# Altium PCB WP_STM32.PcbDoc
Units mil, origin at the board's own origin, x right, y up, seen from the top; angles counter-clockwise.
Board outline 1968.5 x 1377.95 mil, 4 copper layers (Top Layer, Layer 1, Layer 2, Bottom Layer), stack 55.118 mil thick; 52 components, 50 nets, 217 pads, 60 vias.
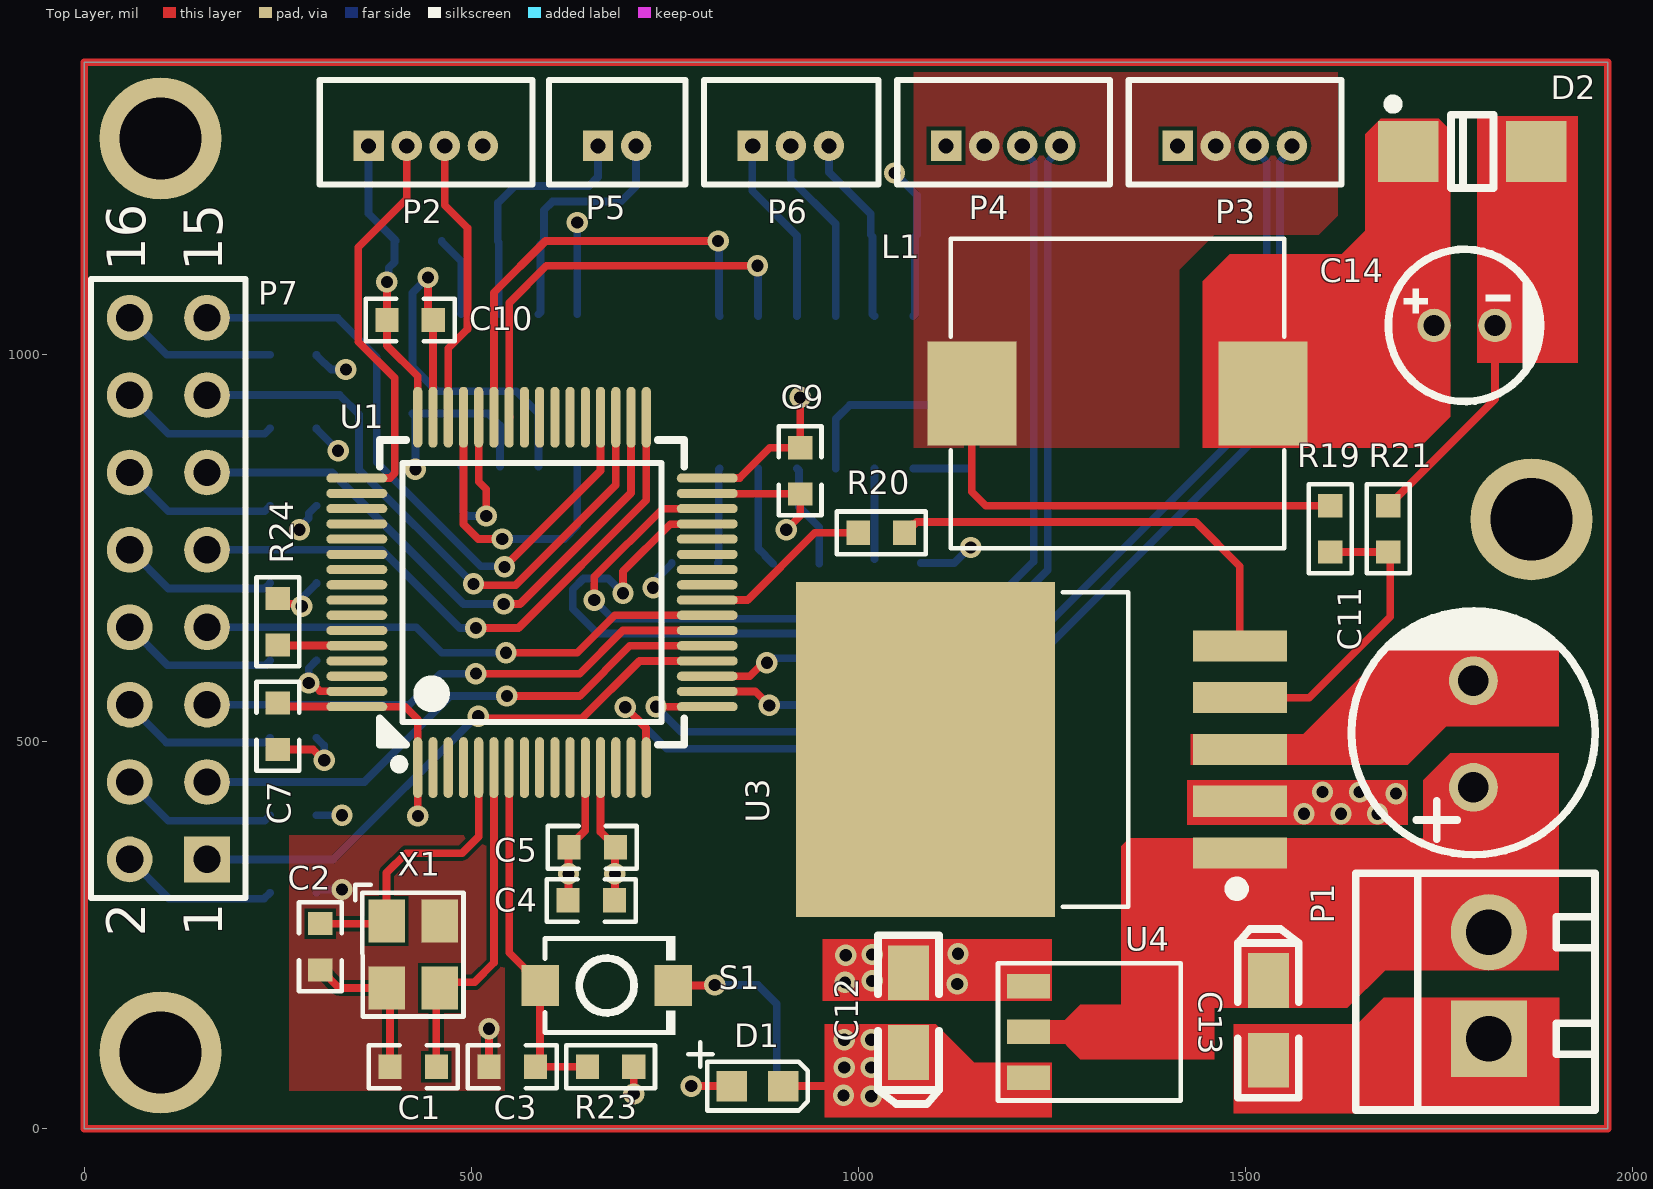
[diagram p0: Top Layer view]
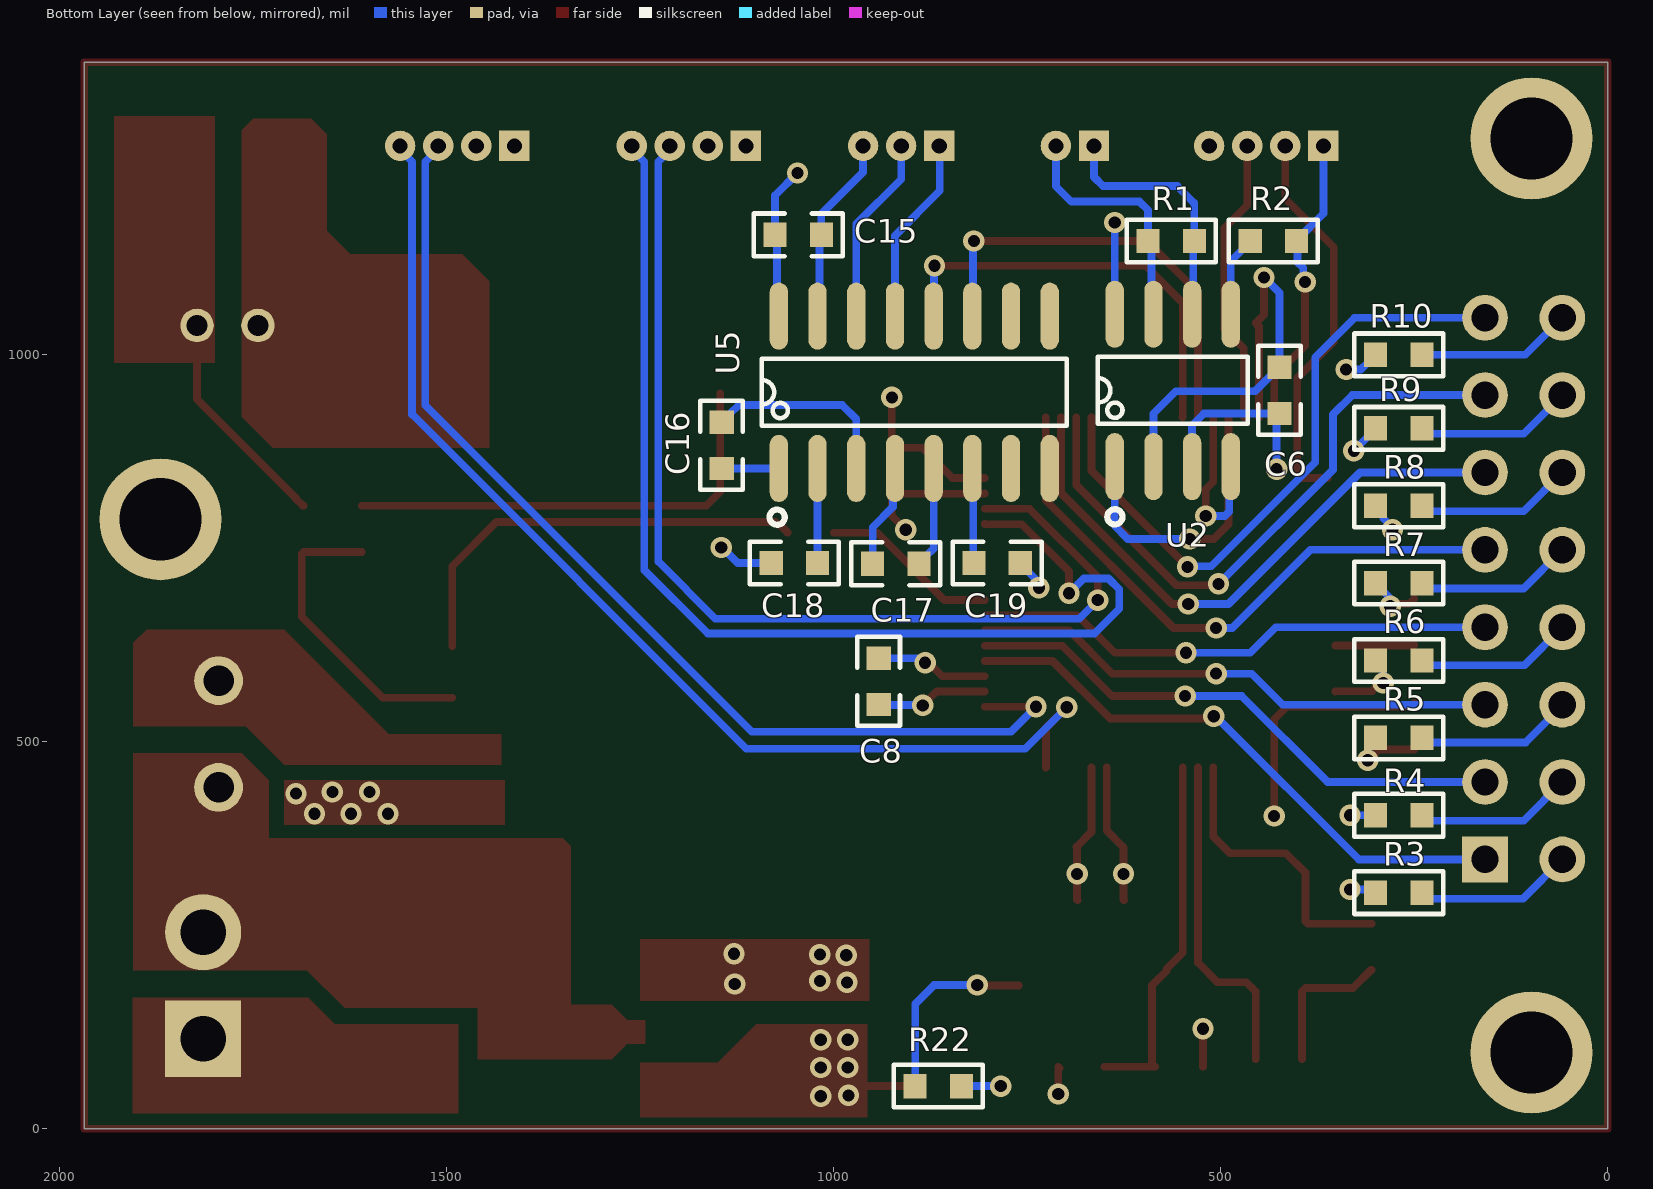
[diagram p1: Bottom Layer view, seen from below]
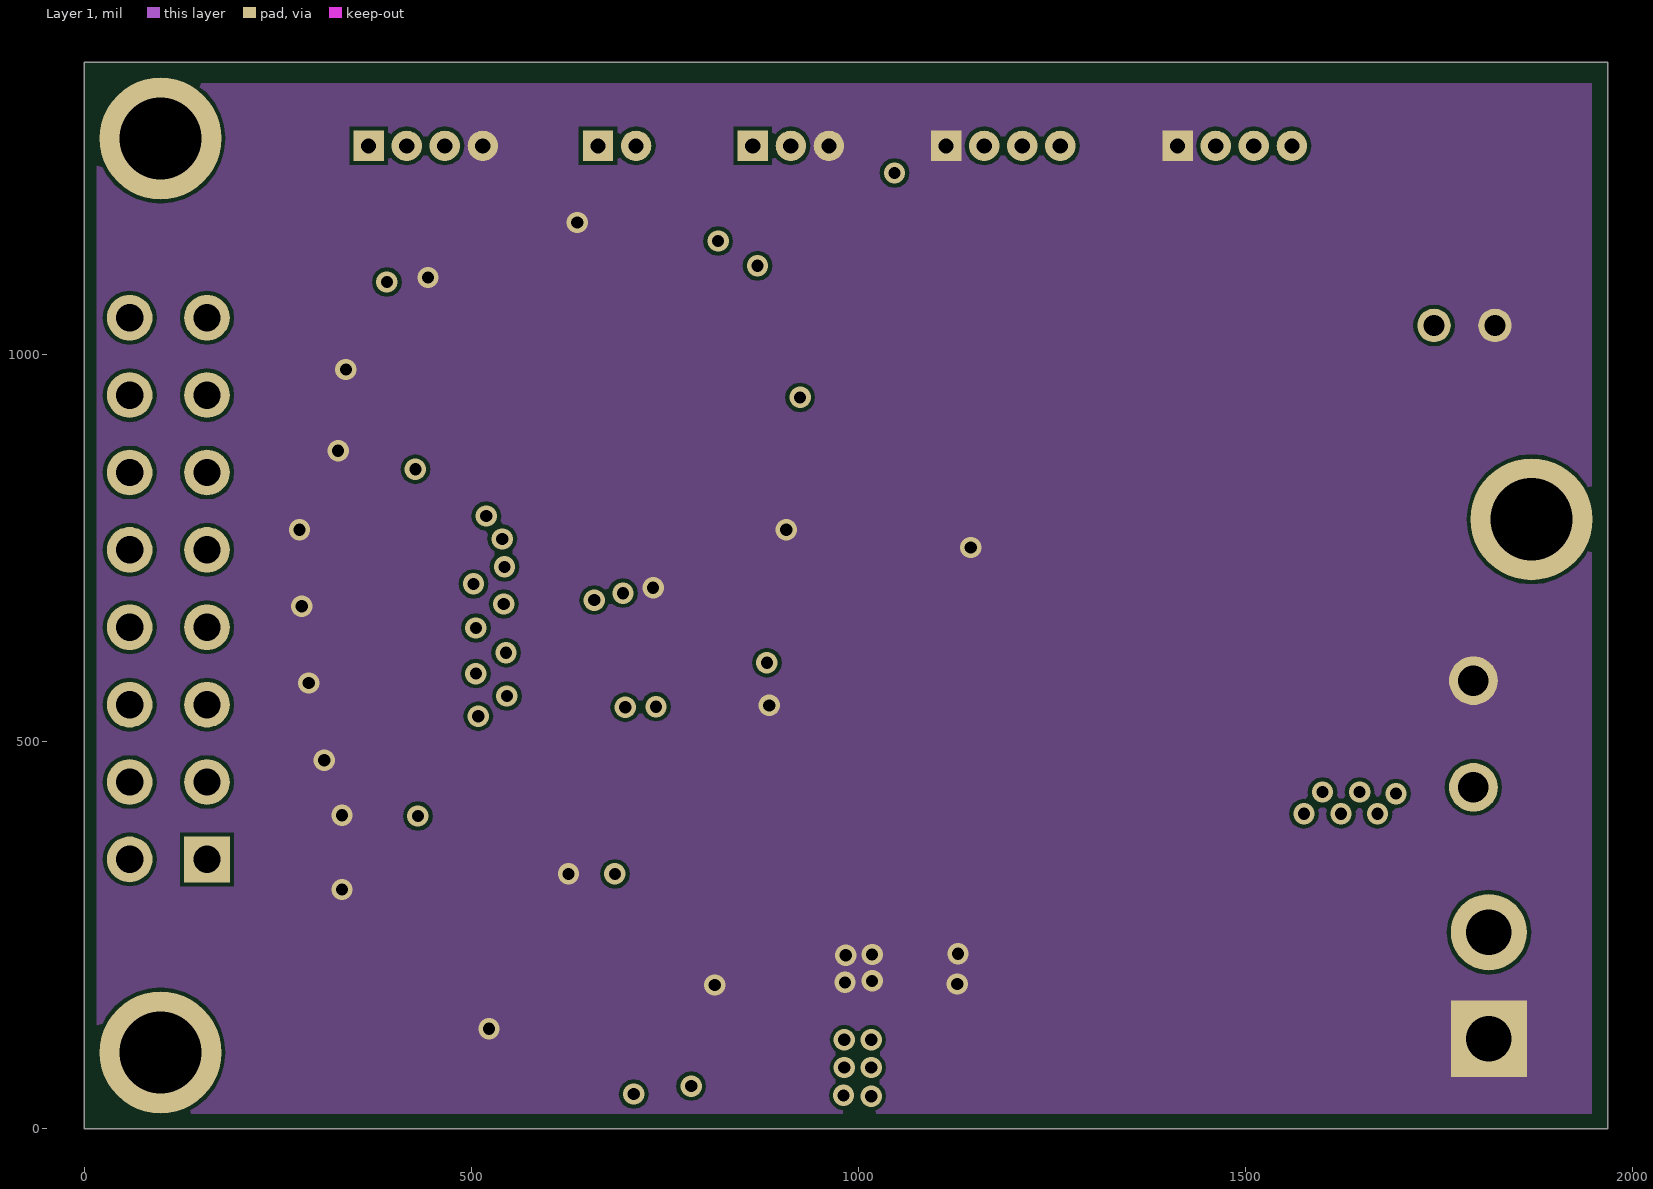
[diagram p2: Layer 1]
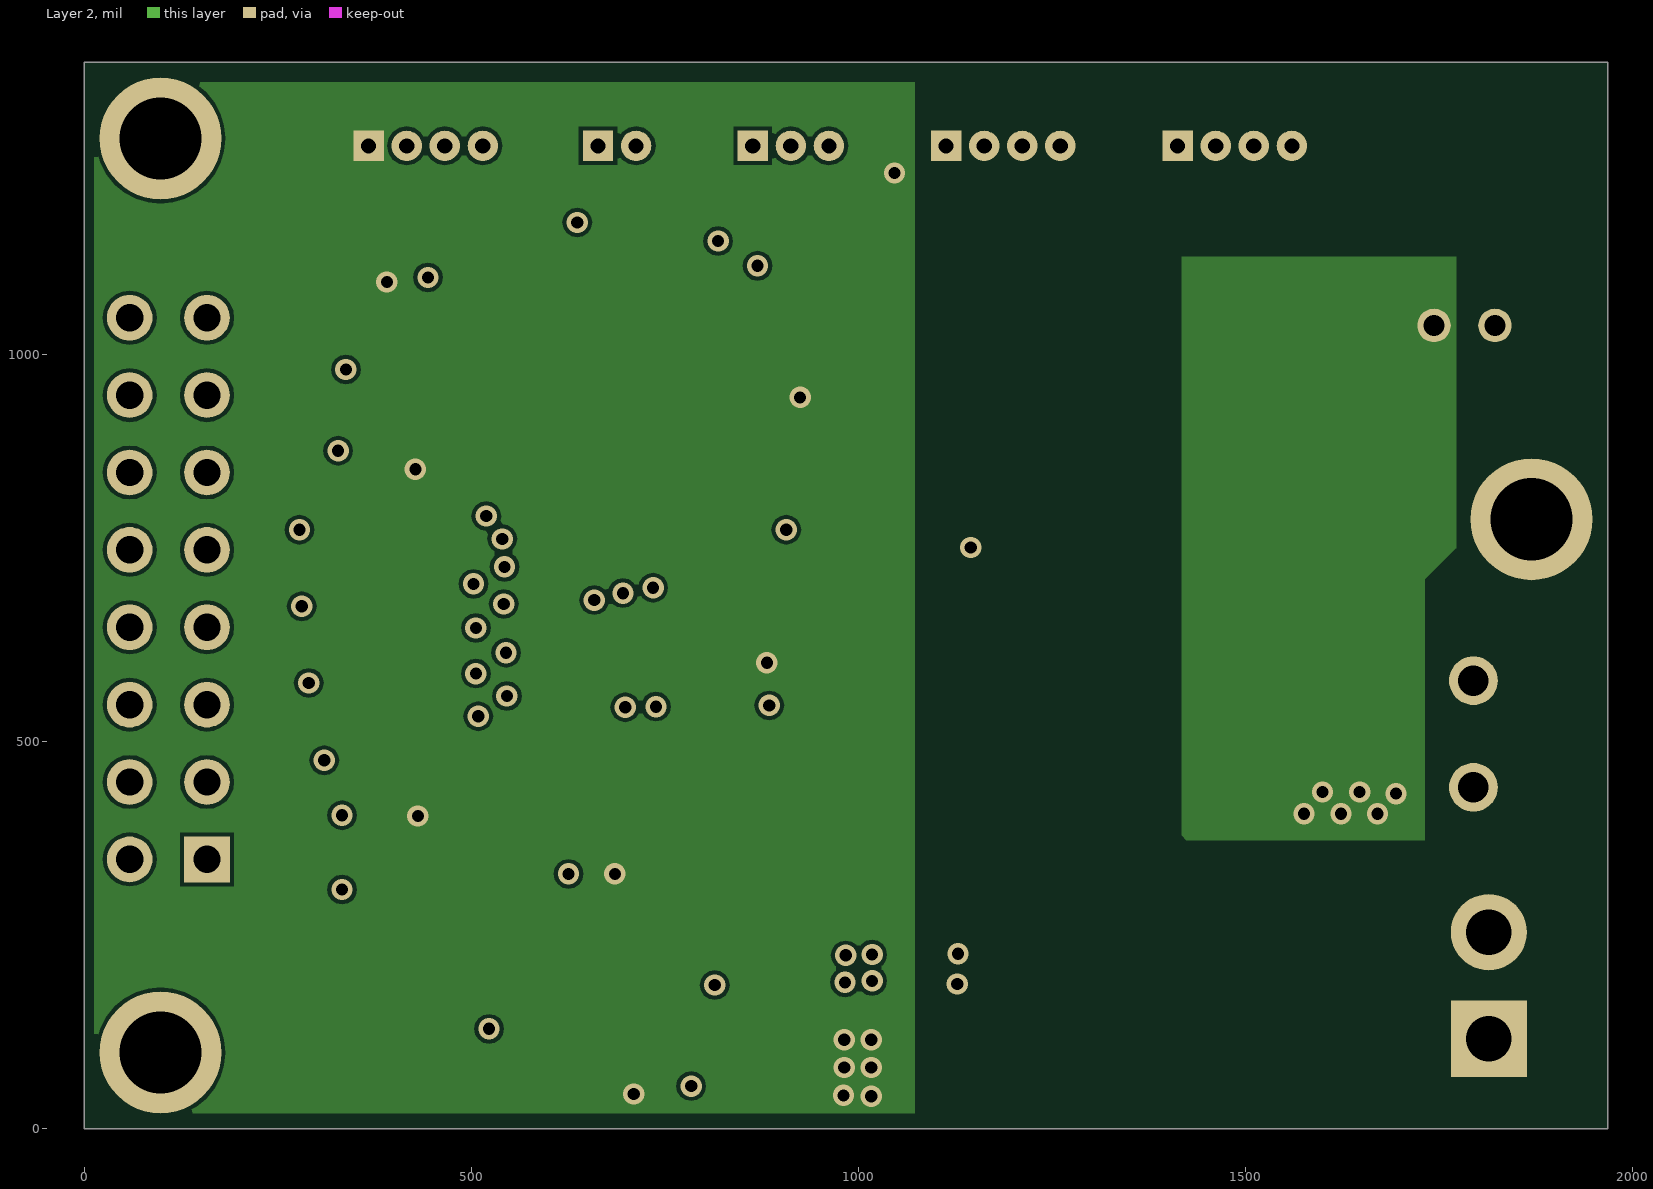
[diagram p3: Layer 2]

## Layer stack, top to bottom
Top Solder: solder mask 3.937, Solder Resist, Dk 3.5
Top Layer: signal copper 7.874
Dielectric 2: prepreg 7.874, PP-006, Dk 4.1
Layer 1: signal copper 7.874
Dielectric 1: dielectric 7.874, FR-4, Dk 4.8
Layer 2: signal copper 7.874
Dielectric 3: prepreg 7.874, PP-006, Dk 4.1
Bottom Layer: signal copper 7.874
Bottom Solder: solder mask 3.937, Solder Resist, Dk 3.5

## Board outline
0,0 0,1377.95 1968.5,1377.95 1968.5,0

## Design rules (kind name [scope] priority, off if disabled: settings)
Clearance [All] p1: gap=5 ignorepadtopadclearanceinfootprint=FALSE
PolygonConnect PolygonConnect_1 [All vs IsNamedPolygon('9V_L01_P000') Or IsNamedPolygon('GND_L01_P001') Or IsNamedPolygon('GND_L02_P002') Or IsNamedPolygon('3V3_L03_P003') Or IsNamedPolygon('NETC14_1_L03_P004')] p1: connectstyle=Direct reliefconductorwidth=10 reliefentries=4 polygonreliefangle="90 Angle" airgapwidth=10
PolygonConnect [All] p2: connectstyle=Relief reliefconductorwidth=10 reliefentries=4 polygonreliefangle="90 Angle" airgapwidth=10
RoutingVias [All] p1: holewidth=28 width=50 viastyle="Through Hole" minholewidth=28 minwidth=50 maxholewidth=28 maxwidth=50
SolderMaskExpansion [All] p1: expansion=4 istentingtop=FALSE
Width [All] p1: maxlimit=10 minlimit=10 preferedwidth=10
30 further rules are at their usual default settings.

## Components (designator, comment, footprint, x,y, rotation, side; value= is the part's Value field where it differs from the comment)
C1 "Cap" 0603C 425,80 r0 top value=22pF
C2 "Cap" 0603C 305,235 r90 top value=22pF
C3 "Cap" 0603C 553,80 r180 top value=100nF
C4 "Cap" 0603C 655,295 r180 top value=2.2uF
C5 "Cap" 0603C 656.36,363.51 r180 top value=2.2uF
C6 "Cap" 0603C 424,954 r270 bottom value=100nF
C7 "Cap" 0603C 250,520 r90 top value=100nF
C8 "Cap" 0603C 942,578 r90 bottom value=100nF
C9 "Cap" 0603C 925,850 r90 top value=100nF
C10 "Cap" 0603C 421,1045 r180 top value=100nF
C11 "220UF/35V" CAP-TH_BD8.0-P3.50-D0.6-FD 1795,510 r90 top
C12 "Cap Pol3" LC-CASE-A_3216 1065,150 r270 top value=10uF
C13 "Cap Pol3" LC-CASE-A_3216 1530,140 r90 top value=10uF
C14 "100UF/16V" CAP-TH_BD5.0-P2.00-D0.5-FD-1 1783.5,1037.95 r0 top
C15 "Cap" 0603C 1046,1155 r180 bottom value=100nF
C16 "Cap" 0603C 1145,883 r90 bottom value=100nF
C17 "Cap" 0603C 919.88,730 r180 bottom value=100nF
C18 "Cap" 0603C 1051,731 r0 bottom value=100nF
C19 "Cap" 0603C 789,731 r180 bottom value=100nF
D1 "LED_B" 0603D 870,55 r0 top
D2 "SS33" LC-SMA(DO-214AC) 1793.5,1262.95 r0 top
L1 "47UH" IND-SMD_L10.8-W10.0_SLO1040H 1335,950 r180 top
P1 "Header 2" KF350-2P 1815,185 r90 top
P2 "Header 4" "MX 1.25-LI-4P" 441.57,1270 r0 top
P3 "Header 4" "MX 1.25-LI-4P" 1487,1270 r0 top
P4 "Header 4" "MX 1.25-LI-4P" 1187.79,1270 r0 top
P5 "Header 2" "MX 1.25-LI-2P" 688.79,1270 r0 top
P6 "Header 3" "MX 1.25-LI-3P" 913,1270 r0 top
P7 "Header 8X2" HDR2X8 158.5,347.95 r90 top
R1 "Res3" 0603R 564,1147 r180 bottom value=120R
R2 "Res3" 0603R 432,1147 r180 bottom value=560R
R3 "Res3" 0603R 270,305 r180 bottom value=NC
R4 "Res3" 0603R 270,405 r180 bottom value=NC
R5 "Res3" 0603R 270,505 r180 bottom value=NC
R6 "Res3" 0603R 270,605 r180 bottom value=NC
R7 "Res3" 0603R 270,705 r180 bottom value=NC
R8 "Res3" 0603R 270,805 r180 bottom value=NC
R9 "Res3" 0603R 270,905 r180 bottom value=NC
R10 "Res3" 0603R 270,1000 r180 bottom value=NC
R19 "Res3" 0603R 1610,775 r270 top value=6491
R20 "Res3" 0603R 1030,770 r180 top value=NC
R21 "Res3" 0603R 1685,775 r90 top value=1001
R22 "Res3" 0603R 865,55 r0 bottom value=1K
R23 "Res3" 0603R 680,80 r0 top value=1K
R24 "Res3" 0603R 250,655 r90 top value=1K
S1 "TS-1101-C-W" SW-SMD_L3.9-W3.0-P4.45 675,185 r0 top
U1 "STM32F103RCT6" LQFP-64_L10.0-W10.0-P0.50-LS12.0-BL 578.5,692.95 r0 top
U2 "SN65HVD230DR" SOP8 562,954 r180 bottom
U3 "LM2596S-ADJ" TO-263-5_L10.2-W8.9-P1.70-BR 1290,490 r0 top
U4 "HT7533-1" SOT89 1220,125 r270 top
U5 "MAX3232IDR" SOP16 896,951.57 r180 bottom
X1 "X322512MSB4SI" OSC-SMD_4P-L3.2-W2.5-BL 425,225 r270 top value=12MHz

## Footprints (in the part's own frame and the unit in brackets; to place one, negate y for a bottom-side part, rotate by r counter-clockwise, add the part's x,y. Pads: shape width x height; smd on the part's side, far side on the other; paste and mask are expansions set on the pad)
0603C [mm]
  rect 0.76x0.8 smd: 1(-0.76,0) 2(0.76,0)
  silkscreen extent -1.46,-0.7 1.46,0.7, body extent -0.8,-0.41 0.8,0.41, height 0.81
0603D [mm]
  rect 1x1 smd: 1(0.85,0) 2(-0.85,0)
  silkscreen extent -2.28,-0.8 1.65,1.44, body extent -0.8,-0.4 0.8,0.42, height 0.46
0603R [mm]
  rect 0.76x0.8 smd: 1(-0.76,0) 2(0.76,0)
  silkscreen extent -1.46,-0.7 1.46,0.7, body extent -0.8,-0.4 0.8,0.4, height 0.45
CAP-TH_BD5.0-P2.00-D0.5-FD-1 [mm]
  round 1.1 hole 0.7 paste-2539.97 mask+0.05: 1(-1,0) 2(1,0)
  silkscreen extent -2.5,-2.5 2.54,2.5, body extent -2.49,-2.49 2.51,2.49, height 11.01
CAP-TH_BD8.0-P3.50-D0.6-FD [mm]
  round 1.6 hole 1: 1(-1.75,0) 2(1.75,0)
  silkscreen extent -3.96,-4 4.04,4, body extent -4,-4 4.01,4, height 11.51
HDR2X8 [mm] "Connector; Header; 8x2 Position"
  rect 1.5x1.5 hole 0.9: 1(0,0)
  round 1.5 hole 0.9: 2(0,2.54) 3(2.54,0) 4(2.54,2.54) 5(5.08,0) 6(5.08,2.54) 7(7.62,0) 8(7.62,2.54) 9(10.16,0) 10(10.16,2.54) 11(12.7,0) 12(12.7,2.54) 13(15.24,0) 14(15.24,2.54) 15(17.78,0) 16(17.78,2.54)
  silkscreen extent -1.27,-1.27 19.05,3.81
IND-SMD_L10.8-W10.0_SLO1040H [mm]
  rect 2.924x3.42 smd: 1(4.778,0) 2(-4.778,0)
  silkscreen extent -5.48,-5.08 5.48,5.08, body extent -4.95,-4.5 4.95,4.5, height 4.7
KF350-2P [mm] "可拼接端子/10A"
  rect 2.5x2.5 hole 1.5: 1(-1.75,0)
  round 2.5 hole 1.5: 2(1.75,0)
  silkscreen extent -4.09,-3.48 3.69,4.37, body extent -3.9,-3.3 3.5,4.2, height 10
LC-CASE-A_3216 [mm]
  rect 1.8x1.35 smd: 1(1.31,0) 2(-1.31,0)
  silkscreen extent -2.54,-1 3,1, body extent -1.7,-0.84 1.7,0.84, height 1.71
LC-SMA(DO-214AC) [mm]
  rect 2x2 smd: 1(2.1,0) 2(-2.1,0)
  silkscreen extent -2.72,-1.2 0.7,1.67, body extent -2.3,-1.35 2.3,1.35, height 2.4
LQFP-64_L10.0-W10.0-P0.50-LS12.0-BL [mm]
  oval 0.3x2 smd: 1(-3.75,-5.75) 2(-3.25,-5.75) 3(-2.75,-5.75) 4(-2.25,-5.75) 5(-1.75,-5.75) 6(-1.25,-5.75) 7(-0.75,-5.75) 8(-0.25,-5.75) 9(0.25,-5.75) 10(0.75,-5.75) 11(1.25,-5.75) 12(1.75,-5.75) 13(2.25,-5.75) 14(2.75,-5.75) 15(3.25,-5.75) 16(3.75,-5.75) 33(3.75,5.75) 34(3.25,5.75) 35(2.75,5.75) 36(2.25,5.75) 37(1.75,5.75) 38(1.25,5.75) 39(0.75,5.75) 40(0.25,5.75) 41(-0.25,5.75) 42(-0.75,5.75) 43(-1.25,5.75) 44(-1.75,5.75) 45(-2.25,5.75) 46(-2.75,5.75) 47(-3.25,5.75) 48(-3.75,5.75)
  oval 2x0.3 smd: 17(5.75,-3.75) 18(5.75,-3.25) 19(5.75,-2.75) 20(5.75,-2.25) 21(5.75,-1.75) 22(5.75,-1.25) 23(5.75,-0.75) 24(5.75,-0.25) 25(5.75,0.25) 26(5.75,0.75) 27(5.75,1.25) 28(5.75,1.75) 29(5.75,2.25) 30(5.75,2.75) 31(5.75,3.25) 32(5.75,3.75) 49(-5.75,3.75) 50(-5.75,3.25) 51(-5.75,2.75) 52(-5.75,2.25) 53(-5.75,1.75) 54(-5.75,1.25) 55(-5.75,0.75) 56(-5.75,0.25) 57(-5.75,-0.25) 58(-5.75,-0.75) 59(-5.75,-1.25) 60(-5.75,-1.75) 61(-5.75,-2.25) 62(-5.75,-2.75) 63(-5.75,-3.25) 64(-5.75,-3.75)
  silkscreen extent -5,-5.79 5,5, body extent -6,-6 6,6, height 1.45
"MX 1.25-LI-2P" [mm] "长：4.25mm，宽：3.2mm，高：4.2mm"
  rect 1x1 hole 0.5: 1(-0.635,0)
  round 1 hole 0.5: 2(0.615,0)
  silkscreen extent -2.24,-1.27 2.24,2.16, body extent -2.12,-1.15 2.12,2.05, height 4.25
"MX 1.25-LI-3P" [mm] "长：5.5mm，宽：3.2mm，高：4.2mm"
  rect 1x1 hole 0.5: 1(-1.25,0)
  round 1 hole 0.5: 2(0,0) 3(1.25,0)
  silkscreen extent -2.85,-1.27 2.87,2.16, body extent -2.74,-1.15 2.76,2.05, height 4.25
"MX 1.25-LI-4P" [mm] "长：6.75mm，宽：3.2mm，高：4.2mm"
  rect 1x1 hole 0.5: 1(-1.885,0)
  round 1 hole 0.5: 2(-0.635,0) 3(0.615,0) 4(1.865,0)
  silkscreen extent -3.49,-1.27 3.49,2.16, body extent -3.37,-1.15 3.37,2.05, height 4.25
OSC-SMD_4P-L3.2-W2.5-BL [mm]
  rect 1.4x1.2 smd: 1(-1.1,-0.875) 2(1.1,-0.875) 3(1.1,0.875) 4(-1.1,0.875)
  silkscreen extent -2.29,-1.9 2.03,1.65, body extent -1.6,-1.2 1.6,1.3, height 0.7
SOP8 [mm]
  oval 0.6x2.2 smd: 1(-1.905,-2.5) 2(-0.635,-2.5) 3(0.635,-2.5) 4(1.905,-2.5) 5(1.905,2.5) 6(0.635,2.5) 7(-0.635,2.5) 8(-1.905,2.5)
  silkscreen extent -2.46,-4.4 2.46,1.1, body extent -2.5,-3 2.5,3, height 1.9
SOP16 [mm]
  oval 0.6x2.2 smd: 1(-4.445,-2.5) 2(-3.175,-2.5) 3(-1.905,-2.5) 4(-0.635,-2.5) 5(0.635,-2.5) 6(1.905,-2.5) 7(3.175,-2.5) 8(4.445,-2.5) 9(4.445,2.5) 10(3.175,2.5) 11(1.905,2.5) 12(0.635,2.5) 13(-0.635,2.5) 14(-1.905,2.5) 15(-3.175,2.5) 16(-4.445,2.5)
  silkscreen extent -5,-4.35 5,1.1, body extent -5,-3 5,3, height 1.9
SOT89 [mm]
  rect 0.8x1.4 smd: 1(-1.5,0) 2(0,0) 3(1.5,0)
  Top Layer region: 0.402,3.702 0.9,4.2 0.4,4.7 -0.098,4.202
  Top Layer region: -0.398,3.698 0.102,4.198 -0.4,4.7 -0.9,4.2
  Top Layer region: -0.4,4.1 0.4,4.1 0.4,4.7 -0.4,4.7
  Top Layer region: -0.9,1.7 0.9,1.7 0.9,4.2 -0.9,4.2
  Top Layer region: 0,0.8 0.9,1.7 0,2.6 -0.9,1.7
  Top Layer region: -0.4,0.6 0.4,0.6 0.4,1.2 -0.4,1.2
  silkscreen extent -2.25,-1 2.25,5, body extent -2.25,-0.06 2.25,4.24, height 1.51
SW-SMD_L3.9-W3.0-P4.45 [mm]
  rect 1.23x1.36 smd: 1(-2.185,0) 2(2.185,0)
  silkscreen extent -2.03,-1.62 2.25,1.62
TO-263-5_L10.2-W8.9-P1.70-BR [mm]
  rect 3.083x1.02 smd: 1(5.16,-3.4) 2(5.16,-1.7) 3(5.16,0) 4(5.16,1.7) 5(5.16,3.4)
  rect 8.5x11 smd: 6(-5.16,0)
  silkscreen extent -0.66,-5.16 5.26,5.16, body extent -8.28,-5 5.05,5, height 4.5

## Part data
C1 C2 C3 C4 C5 C6 C7 C8 C9 C10 C15 C16 C17 C18 C19: "Capacitor", LatestRevisionDate=17-Jul-2002, LatestRevisionNote="Re-released for DXP Platform.", PackageDescription="Radial Cap, Thru-Hole; 2 Leads; 0.3 in Pin Spacing", PackageReference=RAD-0.3, Published=8-Jun-2000, Publisher="Altium Limited"
C11 C14: library part C+
C12 C13: "Polarized Capacitor (Surface Mount)", LatestRevisionDate=29-May-2009, LatestRevisionNote="IPC-7351 Footprint Added.", PackageDescription="Chip Capacitor", PackageReference=C0805, Published=8-Jun-2000, Publisher="Altium Limited"
D1: library part LED2, "Typical RED, GREEN, YELLOW, AMBER GaAs LED", LatestRevisionDate=17-Jul-2002, LatestRevisionNote="Re-released for DXP Platform.", PackageDescription="SM LED; 2 Flat Leads", PackageReference=3.2X1.6X1.1, PackageVersion=Feb-2002, Published=8-Jun-2000, Publisher="Altium Limited"
D2: library part D
L1: library part L
P1 P5: "Header, 2-Pin", LatestRevisionDate=17-Jul-2002, LatestRevisionNote="Re-released for DXP Platform.", Publisher="Altium Limited"
P2 P3 P4: "Header, 4-Pin", LatestRevisionDate=17-Jul-2002, LatestRevisionNote="Re-released for DXP Platform.", Publisher="Altium Limited"
P6: "Header, 3-Pin", LatestRevisionDate=17-Jul-2002, LatestRevisionNote="Re-released for DXP Platform.", Publisher="Altium Limited"
P7: "Header, 8-Pin, Dual row", LatestRevisionDate=17-Jul-2002, LatestRevisionNote="Re-released for DXP Platform.", Publisher="Altium Limited"
R1 R2 R3 R4 R5 R6 R7 R8 R9 R10 R19 R20 R21 R22 R23 R24: "Resistor", LatestRevisionDate=29-May-2009, LatestRevisionNote="IPC-7351 Footprint Added.", PackageDescription="Chip Resistor", PackageReference=J1-0603, Published=8-Jun-2000, Publisher="Altium Limited"
S1: library part SW-PB, "Switch", LatestRevisionDate=17-Jul-2002, LatestRevisionNote="Re-released for DXP Platform.", PackageDescription="Switch; 2 Leads", PackageReference=SPST-2, Published=24-Mar-1999, Publisher="Altium Limited"
U1: JLCPCB Part Class="Extended Part", Low-Voltage Detect=有, Manufacturer=ST(意法半导体), Operating Temperature Range=-40℃~+85℃, Operating Voltage Range=2V~3.6V, ADC (Bit)=12bit, Add into BOM=yes, CCP Capture/Compare=-, communication protocol=-, Convert to PCB=yes, CPU Core=CM3, CPU Maximum Speed=72MHz, DAC (Bit)=12bit, Datasheet=https://atta.szlcsc.com/upload/public/pdf/source/20180207/C88442_15179953708671359491.pdf, Device=STM32F103RCT6, Direct Memory Access=有, GPIO Ports Number=51, Infrared Data Association=有, Internal Comparator=-, Internal Oscillator=有, LCSC Part Name=STM32F103RCT6, Manufacturer Part=STM32F103RCT6, Peripheral/Function=DMA；片载温度传感器；PWM, Program Memory Type=FLASH, Program Storage Size=256KB, PWM (Bit)=-, RAM Size=48KB, Real-Time Clock=-, Secure Digital Input and Output=-, Supplier=LCSC, Supplier Footprint=LQFP-64(10x10), Supplier Part=C8323, Symbol=STM32F103RCT6, Universal Serial Bus=有, Watchdog=有
U2: JLCPCB Part Class="Basic Part", LCSC Part Name="1Mbps 3V~3.6V", Manufacturer=TI(德州仪器), Supply Voltage=3V~3.6V, Add into BOM=yes, Convert to PCB=yes, Data Rate=1Mbps, Datasheet=https://atta.szlcsc.com/upload/public/pdf/source/20140508/1457707055452.pdf, Device=SN65HVD230DR, Manufacturer Part=SN65HVD230DR, Name=SN65HVD230DR, Supplier=LCSC, Supplier Footprint=SOIC-8, Supplier Part=C12084, Symbol=SN65HVD230DR, Type=收发器
U3: library part LM2596S-ADJ_C347423, Input Voltage=40V, JLCPCB Part Class="Extended Part", Manufacturer=UMW(友台半导体), Operating Temperature=-40℃~+125℃@(TA), Output Current (Max)=3A, Output Voltage=1.2V~37V, Switching Frequency=150kHz, Add into BOM=yes, Convert to PCB=yes, Datasheet=https://atta.szlcsc.com/upload/public/pdf/source/20230506/0930E65C3A8B7B120C8A4D8E5A8AC327.pdf, Device=LM2596S-ADJ_C347423, Function=降压型, LCSC Part Name=LM2596S-ADJ, Manufacturer Part=LM2596S-ADJ, Number of Outputs=1, Output Type=可调, Supplier=LCSC, Supplier Footprint=TO-263-5, Supplier Part=C347423, Switch tube (built-in/external)=内置, Symbol=LM2596S-ADJ, Synchronous Rectification=否, Topology=降压式
U4: library part HT7533-1_C347186, Dropout Voltage=100mV@(1mA), JLCPCB Part Class="Extended Part", LCSC Part Name="输入30V 输出3.3V 100mA", Manufacturer=UMW(友台半导体), MAX Output Current=100mA, Maximum Input Voltage=30V, Operating Temperature=-25℃~+70℃, Output Voltage=3.3V, Power Supply Rejection Ratio (PSRR)=-, standby current=3uA, Add into BOM=yes, Convert to PCB=yes, Datasheet=https://atta.szlcsc.com/upload/public/pdf/source/20231109/E587E38465720CDF1B9E4B203F8DC229.pdf, Device=HT7533-1_C347186, Manufacturer Part=HT7533-1, Number of Outputs=1, Output Polarity=正极, Output Type=固定, Supplier=LCSC, Supplier Footprint=SOT-89, Supplier Part=C347186, Symbol=HT7533-1_C347186
U5: JLCPCB Part Class="Extended Part", LCSC Part Name="具有±15kV ESD 保护功能的MAX3232 3V至5.5V多通道RS-232线路驱动器和接收器", Manufacturer=TI(德州仪器), Operating Temperature=-40℃~+85℃, Supply Voltage=3V~5.5V, Add into BOM=yes, Convert to PCB=yes, Data Rate=250Kbps, Datasheet=https://www.ti.com/cn/lit/gpn/max3232, Device=MAX3232IDR, Driver/receiver=2/2, Manufacturer Part=MAX3232IDR, Supplier=LCSC, Supplier Footprint=SOIC-16, Supplier Part=C18261, Symbol=MAX3232IDR, Types=收发器
X1: External load capacitor=20pF, Frequency Stability(Full temperature range)=±30ppm, JLCPCB Part Class="Basic Part", LCSC Part Name="12MHz ±10ppm 20pF", Manufacturer=YXC(扬兴晶振), Normal temperature Frequency Tolerance=±10ppm, Operating Temperature=-40℃~+85℃, Add into BOM=yes, Convert to PCB=yes, Crystal Type=贴片晶振, Datasheet=https://atta.szlcsc.com/upload/public/pdf/source/20210329/C112971_1F611BDC486E193C1706F6D8EB5AA189.pdf, Device=X322512MSB4SI, Manufacturer Part=X322512MSB4SI, Supplier=LCSC, Supplier Footprint=SMD3225-4P, Supplier Part=C9002, Symbol=X322512MSB4SI

## Free pads (board coordinates)
  round 157.48 hole 106.3: 1(98.43,98.43) 1(98.43,1279.53) 1(1870.08,787.4)

## Via types
v1: diameter 27.56, hole 15.75, Top Layer to Bottom Layer, 60 vias

## Nets (pads, with @x,y where several pads share a name; then routed paths per layer and width w, separated by ;. In a path a pad name is that pad's centre, name@x,y a point inside that pad or via, vN(x,y) a via of type N, cw(c..) or ccw(c..) an arc to the next point about the centre after c; other vN are vias at no path point)
3V3: C4.1 C5.1 C6.2 C7.2 C8.2 C9.2 C10.2 C12.1 C15.1 D1.1 P2.1 R2.2 R23.2 U1.1 U1.13 U1.19 U1.32 U1.48 U1.64 U2.3 U4.3 U5.16 | length 1794
  Top Layer w10: C7.2 254.26,545.66 351.79,545.66 U1.64 414.69,545.31 430.86,529.14 U1.1 430.86,404.14 v1(431,404) ; v1(391,1094) 391.08,1093.92 C10.2 391.08,1011.92 430.86,972.14 U1.48 ; U1.13 667.08,383.5 686.28,364.3 C5.1 685.6,362.83 685.6,295.68 C4.1 ; R23.2 708,78.08 710,76.08 v1(710,44.77) ; U1.19 859.93,584.68 877.25,602 v1(882,602) ; U1.32 805.22,840.94 846.94,840.94 885.92,879.92 C9.2 v1(925,945) ; D1.1 964.25,55 976.25,43 v1(981,43)
  Bottom Layer w10: P2.1 367.36,1182.5 402.08,1147.79 R2.2 400.96,1145.88 400.96,1119.96 393.35,1112.35 393.35,1096.35 v1(391,1094) ; v1@428,852 428,920.08 C6.2 521.92,924.08 537,909 U2.3 ; v1(882,602) 886.75,602 892.67,607.92 C8.2 ; v1(1047,1235) 1075.92,1206.08 C15.1 1073.46,1152.54 1073.46,1052.46 U5.16
  other v1: 1017,42 982,79 1017,79 982,115 1017,115 685.6,329.26 427.79,852.14
9V: L1.1 P3.2 P4.2 R19.1 | length 597.5
  Top Layer w10: L1.1 1146.89,823.11 1165.08,804.92 R19.1
24V_IN: C11.1 C13.1 P1.2 U3.1 U4.2
\E\N\: R20.2 U1.24 | length 231.2
  Top Layer w10: U1.24 848.21,683.11 857.11,683.11 944,770 R20.2
BOOT: R24.1 U1.60 | length 102.6
  Top Layer w10: R24.1 250.68,624.4 351.79,624.4 U1.60
CAN_RX: U1.44 U2.4 | length 223.3
  Top Layer w10: U1.44 509.6,836 519.3,826.3 v1(519.3,791.7)
  Bottom Layer w10: U2.4 488.92,853.66 488.92,797.56 494.78,791.7 v1(519.3,791.7)
CAN_TX: U1.45 U2.1 | length 376.8
  Top Layer w10: U1.45 489.92,781.08 509,762 v1(540,762)
  Bottom Layer w10: v1(540,762) 620,762 637,779 U2.1
CANH: P5.2 R1.1 U2.7 | length 321.3
  Bottom Layer w10: U2.7 589.61,1055.03 589.61,1142.69 R1.1 593.92,1186.92 605,1198 693,1198 713,1218 P5.2
CANL: P5.1 R1.2 U2.6 | length 328.7
  Bottom Layer w10: U2.6 535.54,1053.89 535.54,1145.54 R1.2 534.08,1196.08 556,1218 652,1218 663.79,1229.79 P5.1
GND: C1.1 C2.1 C3.2 C4.2 C5.2 C6.1 C7.1 C8.1 C9.1 C10.1 C11.2 C12.2 C13.2 C14.2 C15.2 C18.2 C19.2 D2.1 P1.1 P2.4 P3.1 P4.1 P6.3 R3.1 R4.1 R5.1 R6.1 R7.1 R8.1 R9.1 R10.1 R21.2 R22.2 R24.2 S1.2 U1.12 U1.18 U1.31 U1.47 U1.63 U2.2 U2.8 U3.3 U4.1 U5.15 X1.2 X1.4 | length 2786
  Top Layer w10: C7.1 295.36,490.08 309.44,476 v1(310,476) ; R24.2 256.56,678.36 277.64,678.36 v1(281,675) ; v1(290,576) 293.99,576 304.64,565.35 351.79,565.35 U1.63 ; C2.1 305.79,205.08 329.18,181.69 X1.2 395.08,177.16 C1.1@395.08,90 ; U1.47 450.55,1036.63 C10.1@454.92,1041 ; C10.1 444,1051.92 v1(444,1100) 448,1100 v1@451,1097 ; v1(523,129) 523.08,128.92 C3.2 ; C4.2 625.76,295.68 625.76,362.83 C5.2 626.44,364.3 647.4,385.26 U1.12 ; S1.2 813.98,185 v1(814.58,185.6) ; U1.18 867,565 v1(885,547) ; U1.31 805.18,820.59 C9.1@925,820.59 ; v1(907,774) 925,792 C9.1 ; R21.2 1685.79,804.92 1695.75,814.88 1695.75,815.67 1822.87,942.8 C14.2
  Bottom Layer w10: v1(278,774) 278,776.68 289.96,788.64 289.96,795.04 R8.1 ; v1(281,675) 281,685.29 299.92,704.21 R7.1 ; v1(290,576) 290,595.08 R6.1 ; R3.1 303.92,309 v1(333,309) ; R4.1 v1(333,405) ; R5.1 309.88,495.04 309.88,476.12 v1(310,476) ; R9.1 299.92,904.21 328,876.13 v1(328,876) ; R10.1 299.92,999.21 309.88,989.25 310.67,989.25 318.92,981 v1(338,981) ; v1(444,1100) 424,1080 C6.1 424.79,983.92 455.71,953 558,953 587,924 U2.2 ; U2.8 v1(637,1171) ; v1(735,699) 738.36,702.36 738.36,709.49 759.08,730.21 C19.2 ; v1(814.58,185.6) 870.4,185.6 894.92,161.08 R22.2 ; v1(885,547) 885.54,547.54 941.46,547.54 C8.1 ; P6.3 962.21,1235.79 1016.08,1181.92 C15.2 1018.54,1152.54 1018.54,1052.46 U5.15 ; C18.2 1124,731 v1@1140,747
  other v1: 1128,187 983,189 1018,191 984,224 1018,225 1129,226 625.76,329.26 1145.49,750.94
NetC14_1: C14.1 D2.2 L1.2 U3.2
  other v1: 1576,407 1624,407 1671,407 1695,433 1600,435 1648,435
NetC16_1: C16.1 U5.1 | length 74
  Bottom Layer w10: U5.1 1071.07,853.08 C16.1
NetC16_2: C16.2 U5.3 | length 254.9
  Bottom Layer w10: U5.3 971,917 989,935 1122.92,935 1134.25,923.67 1134.25,922.88 1144.21,912.92 C16.2
NetC17_1: C17.1 U5.4 | length 135.1
  Bottom Layer w10: U5.4 923.61,850.54 923.61,803.4 949.8,777.2 C17.1
NetC17_2: C17.2 U5.5 | length 131
  Bottom Layer w10: U5.5 871,749.74 879.99,740.75 879.99,739.96 C17.2
NetC18_1: C18.1 U5.2 | length 117.2
  Bottom Layer w10: U5.2 U5.2 1021.04,736.04 C18.1@1021.08,736
NetC19_1: C19.1 U5.6 | length 123
  Bottom Layer w10: C19.1 819.96,732.04 819.96,852.11 U5.6
NetD1_2: D1.2 R22.1 | length 103.3
  Top Layer w10: v1(784.18,55) D1.2
  Bottom Layer w10: v1(784.18,55) R22.1
NetP7_2: P7.2 R3.2 | length 206
  Bottom Layer w10: P7.2 109.46,297 232.08,297 R3.2
NetP7_4: P7.4 R4.2 | length 205.2
  Bottom Layer w10: P7.4 108.46,398 233.08,398 R4.2
NetP7_6: P7.6 R5.2 | length 205.1
  Bottom Layer w10: P7.6 58.5,546.5 105.86,499.14 234.22,499.14 R5.2
NetP7_8: P7.8 R6.2 | length 204.3
  Bottom Layer w10: P7.8 107.46,599 234.08,599 R6.2
NetP7_10: P7.10 R7.2 | length 205.2
  Bottom Layer w10: P7.10 108.46,698 233.08,698 R7.2
NetP7_12: P7.12 R8.2 | length 205.2
  Bottom Layer w10: P7.12 108.46,798 233.08,798 R8.2
NetP7_14: P7.14 R9.2 | length 205.2
  Bottom Layer w10: P7.14 108.46,898 233.08,898 R9.2
NetP7_16: P7.16 R10.2 | length 201.4
  Bottom Layer w10: P7.16 106.46,1000 R10.2
NetR2_1: R2.1 U2.5 | length 105.7
  Bottom Layer w10: R2.1 461.92,1146.21 487,1121.13 U2.5 U2.5@486.5,1052.92
NetR19_2: R19.2 R21.1 U3.4 | length 397.3
  Top Layer w10: U3.4 1582.93,556.93 1687.5,661.5 1687.5,742.58 R21.1 R19.2
NetR20_1: R20.1 U3.5 | length 566.1
  Top Layer w10: R20.1 1059.92,770.79 1069.88,780.75 1072.49,780.75 1075.74,784 1436,784 1493.14,726.86 U3.5
nRST: C3.1 R23.1 S1.1 U1.7 | length 470
  Top Layer w10: U1.7 548.97,227.57 569.77,206.77 569.77,204.21 S1.1 588.98,84.06 584.92,80 588.98,80 R23.1
OSC_IN: C2.2 U1.5 X1.1 | length 376.7
  Top Layer w10: C2.2 387.16,264.92 X1.1 390.55,330.55 416,356 488,356 509.6,377.6 U1.5
OSC_OUT: C1.2 U1.6 X1.3 | length 429.2
  Top Layer w10: C1.2@454.92,90 454.92,177.16 X1.3 466.97,189.21 504.21,189.21 529.29,214.29 U1.6
PA4: P7.1 U1.20 | length 755.1
  Top Layer w10: v1(509,533) 512,530 643,530 717.37,604.37 U1.20
  Bottom Layer w10: P7.1 321.7,347.95 506.75,533 v1(509,533)
PA5: P7.3 U1.21 | length 719.3
  Top Layer w10: v1(546,559) 640,559 705.05,624.05 U1.21
  Bottom Layer w10: P7.3 361.95,447.95 473,559 v1(546,559)
PA6: P7.5 U1.22 | length 686
  Top Layer w10: v1(506,588) 640,588 695.74,643.74 U1.22
  Bottom Layer w10: P7.5 419.95,547.95 460,588 v1(506,588)
PA7: P7.7 U1.23 | length 680.1
  Top Layer w10: v1(545,615) 637,615 685.42,663.42 U1.23
  Bottom Layer w10: P7.7 429.05,647.95 462,615 v1(545,615)
PB12: P7.9 U1.33 | length 785
  Top Layer w10: v1(506,647) 561,647 726.14,812.14 U1.33
  Bottom Layer w10: P7.9 384.05,747.95 485,647 v1(506,647)
PB13: P7.11 U1.34 | length 775.6
  Top Layer w10: v1(542,678) 563,678 706.45,821.45 U1.34
  Bottom Layer w10: P7.11 320.05,847.95 490,678 v1(542,678)
PB14: P7.13 U1.35 | length 813.2
  Top Layer w10: v1(503,704) 504.78,702.22 557.22,702.22 686.77,831.77 U1.35
  Bottom Layer w10: P7.13 330.05,947.95 355,923 355,851.44 502.44,704 v1(503,704)
PB15: P7.15 U1.36 | length 842.2
  Top Layer w10: v1(543,726) 667.08,850.08 U1.36
  Bottom Layer w10: P7.15 327.05,1047.95 378,997 378,861 512.22,726.78 542.22,726.78 v1(543,726)
RX_232: P6.1 U5.13 | length 244.4
  Bottom Layer w10: P6.1 863,1269.21 863,1212 921,1154 U5.13
SWCLK: P2.2 U1.49 | length 510
  Top Layer w10: U1.49@362.16,840.59 362.51,840.94 395.14,840.94 401,846.8 401,970 354,1017 354,1139 416.57,1201.57 P2.2
SWDIO: P2.3 U1.46 | length 373
  Top Layer w10: P2.3 465.79,1193.21 495,1164 495,1033 470.23,1008.23 U1.46
TX_232: P6.2 U5.14 | length 244
  Bottom Layer w10: P6.2 913,1227 971,1169 U5.14
UART1_RX: U1.43 U5.11 | length 576.1
  Top Layer w10: U1.43 529.29,1080.29 596,1147 v1(819,1147)
  Bottom Layer w10: v1(819,1147) 820,1146 820,1051 U5.11
UART1_TX: U1.42 U5.12 | length 554.5
  Top Layer w10: U1.42@549.32,919.67 U1.42 548.97,1066.97 597,1115 v1(870,1115)
  Bottom Layer w10: v1(870,1115) 870.5,1114.5 870.5,1050.5 U5.12
UART2_RX: P3.3 U1.17 | length 1385.6
  Top Layer w10: v1(738.69,545.31) U1.17
  Bottom Layer w10: v1(738.69,545.31) 771,513 1106,513 1528,935 1528,1249.46 1511.21,1266.24 P3.3
UART2_TX: P3.4 U1.16 | length 1489.7
  Top Layer w10: v1(699,544.5) 725.8,517.7 725.8,466.93 U1.16
  Bottom Layer w10: v1(699,544.5) 752.5,491 1113,491 1545,923 1545,1249.46 1560.43,1264.88 P3.4
UART3_RX: P4.3 U1.30 | length 1364.2
  Top Layer w10: v1(659,683) 659,713 747.22,801.22 U1.30
  Bottom Layer w10: v1(659,683) 683,659 1153,659 1227,733 1227,1249.46 1212,1264.46 P4.3
UART3_TX: P4.4 U1.29 | length 1482
  Top Layer w10: v1(696,692) 696,720 757.19,781.19 804.53,781.19 U1.29
  Bottom Layer w10: v1(696,692) 677,711 645,711 631,697 631,672 663,640 1163,640 1245,722 1245,1249.46 1261.21,1265.67 P4.4
pads on no net: U1.2 U1.3 U1.4 U1.8 U1.9 U1.10 U1.11 U1.14 U1.15 U1.25 U1.26 U1.27 U1.28 U1.37 U1.38 U1.39 U1.40 U1.41 U1.50 U1.51 U1.52 U1.53 U1.54 U1.55 U1.56 U1.57 U1.58 U1.59 U1.61 U1.62 U3.6 U5.7 U5.8 U5.9 U5.10
copper on no net: | length 6692.9
  Top Layer w10: 0,0 1968.5,0 1968.5,1377.95 0,1377.95 0,0

## Polygon pours and split planes (outlines as drawn)
9V on Top Layer "9V_L01_P000" (solid, pour order 0): 1620,1365 1620,1180 1595,1155 1460,1155 1415,1110 1415,880 1072,880 1072,1365
GND on Top Layer "GND_L01_P001" (solid, pour order 1): 265,379 543,379 543,49 265,49
3V3 on Layer 2 "3V3_L03_P003" (solid, pour order 3): 1073,1352 1073,929 1073,20 13,20 13,1352
NetC14_1 on Layer 2 "NETC14_1_L03_P004" (solid, pour order 4): 1773,750 1772,750 1732,710 1732,373 1424,373 1418,379 1418,1127 1773,1127
GND on Layer 1 "GND_L02_P002" (solid, pour order 2): 16,1351 1948,1351 1948,19 16,19

## Other copper
Top Layer:
  region net GND: 1250,245 954,245 954,165 1250,165
  region net 3V3: 1250,85 1150,85 1100,135 957,135 957,15 1250,15
  region net NetC14_1: 1425,450 1710,450 1710,392.5 1425,392.5
  region net GND: 1430,470 1710,470 1760,520 1905,520 1905,628 1888,645 1710,645 1575,510 1430,510
  region net GND: 1485,135 1485,20 1906,20 1906,169 1679,169 1645,135
  region net 24V_IN: 1730,450 1765,485 1905,485 1905,205 1681,205 1632,156 1460,156 1460,90 1340,90 1340,365 1350,375 1730,375
  region net NetC14_1: 1675,1305 1655,1285 1655,1160 1625,1130 1480,1130 1445,1095 1445,880 1725,880 1765,920 1765,1290 1750,1305 1700,1305
  region net GND: 1800,1308 1800,1055 1800,990 1930,990 1930,1308

## Text inside footprints (layer, text, board x,y; h text height)
P7: Top Overlay "2" at 78.5,247.95 h50 r90; Top Overlay "1" at 178.5,247.95 h50 r90; Top Overlay "15" at 178.5,1107.95 h50 r90; Top Overlay "16" at 78.5,1107.95 h50 r90